# EAGLE board lpc21481 (EAGLE 9.4.1)
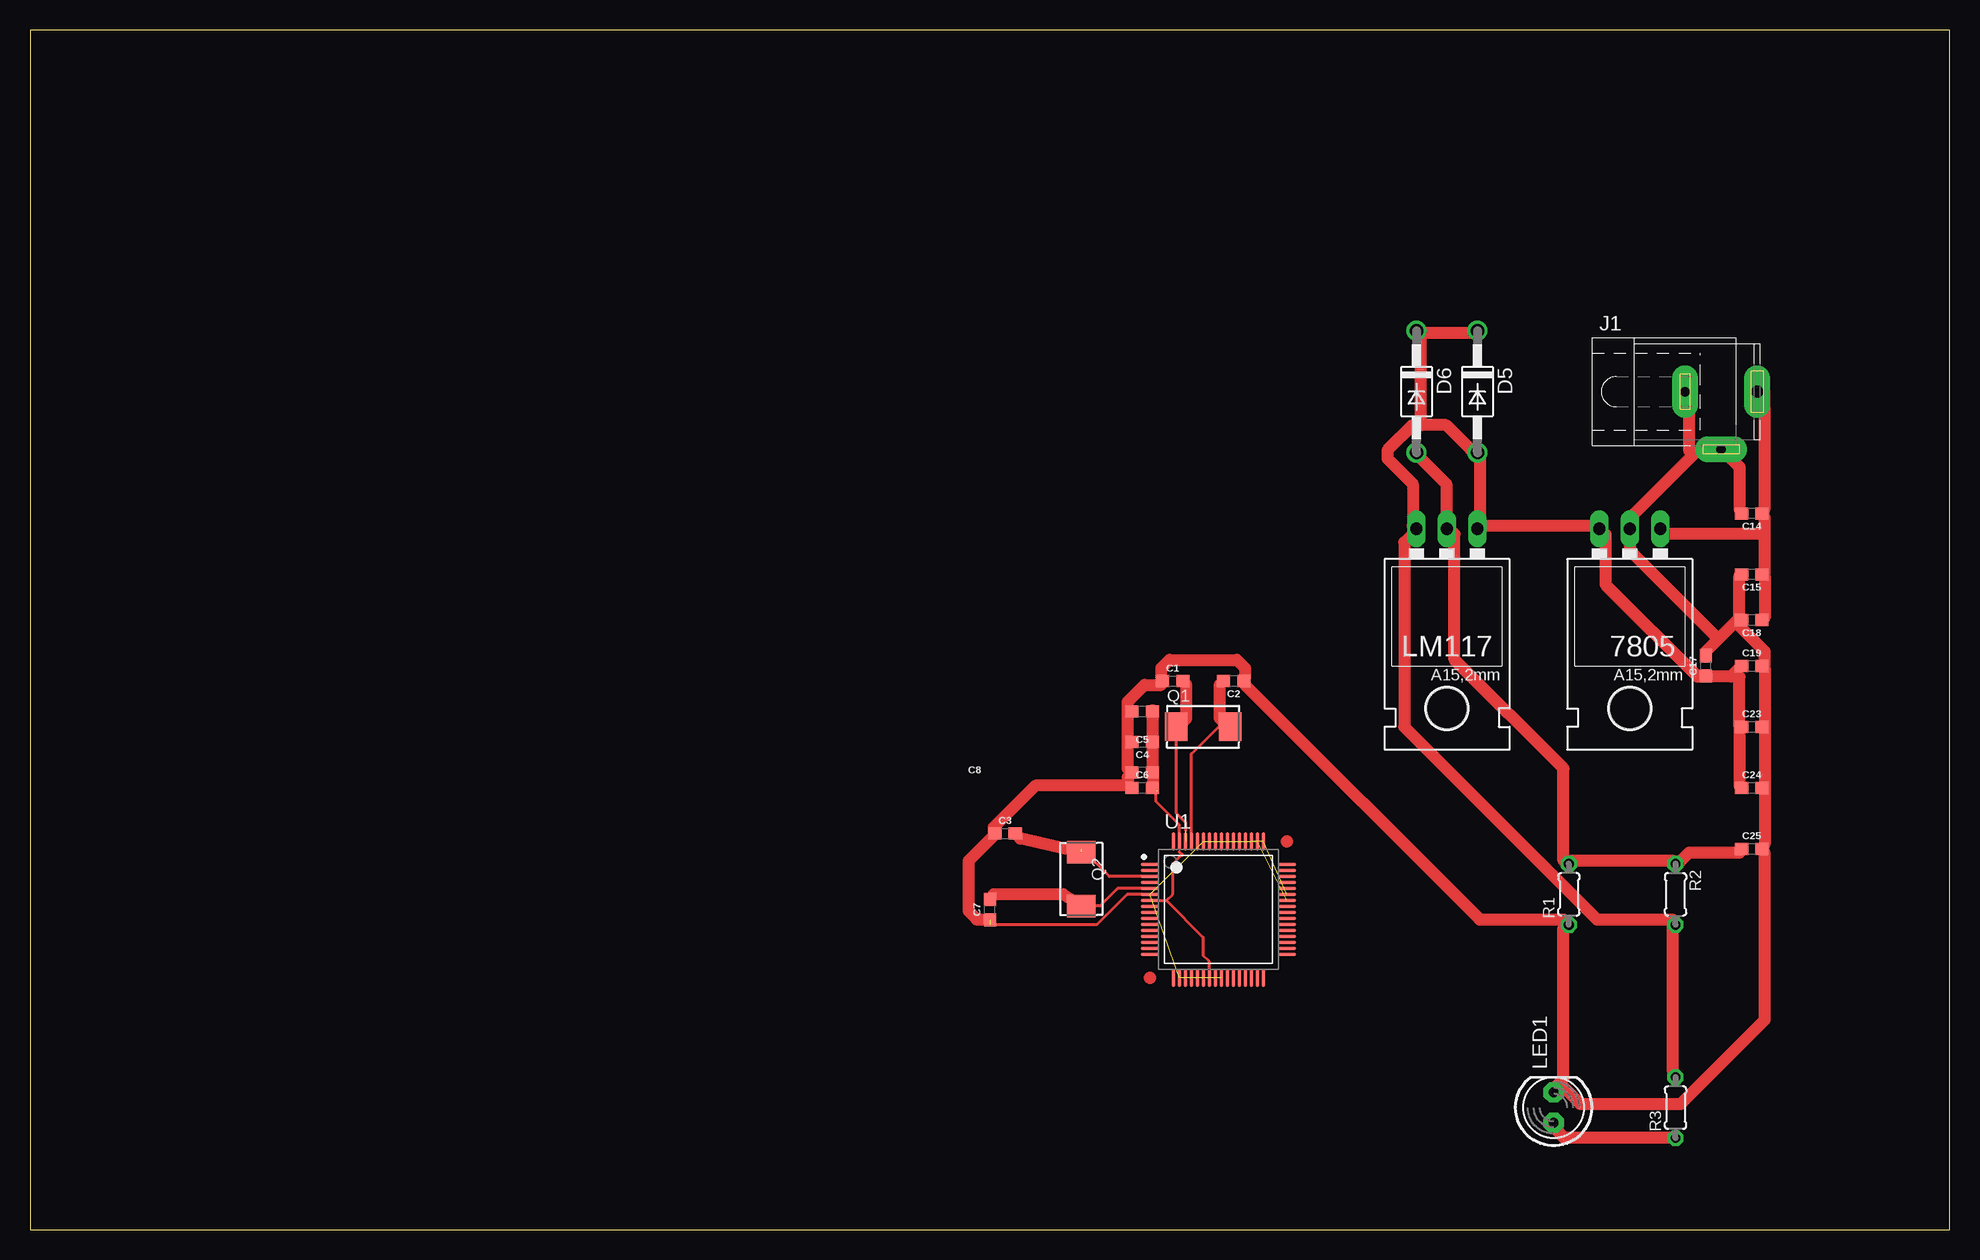
[diagram p0: board, top side]

Size 160 x 100 mm. Coordinates in mm from the lower left corner, seen from the top.
Outline: 0,0 160,0 160,100 0,100 0,0
Copper layers (1*16): Top 0.035mm / dielectric 1.5mm / Bottom 0.035mm
Design rules "default": minimum track width 6mil, minimum drill 0.35mm, track to track 6mil, track to pad 6mil, pad to pad 6mil, via to via 6mil, smd to smd 6mil, copper to edge 40mil, drill to drill 6mil, minimum pad ring 10mil, minimum via ring 8mil, stop-mask expansion 4mil, vias tented up to drill 0mil, thermal gap 10mil
Net classes: 0 default: width 0.254 mm, drill 0.254 mm, clearance 0.254 mm

## Footprints (pad centres in the part's own frame; a part is rotated, then mirrored left to right if it is on the bottom)
78XXL = drill 1.016 long: GND 0,-3.81; IN -2.54,-3.81; OUT 2.54,-3.81 | hole 3.302: 0,11.176
0603 = smd 1.1 x 1: 1 -0.85,0; 2 0.85,0
DO41-10 = drill 1.118: A 5.08,0; C -5.08,0
SPC4078 = drill 0.8 pad 2.184 long: 1 -3,0; 2 0,-4.8 | drill 1 pad 2.184 long: 3 3,0
LED5MM = drill 0.813 pad 1.676 octagon: A -1.27,0; K 1.27,0
6.0X3.5_2 = smd 1.9 x 2.4: 1 -2.25,0; 2 2.25,0
0204/5 = drill 0.813 octagon: 1 -2.54,0; 2 2.54,0
TSQFP50P1200X1200X160-64N = smd 1.55 x 0.3: 1 -5.7,3.75; 2 -5.7,3.25; 3 -5.7,2.75; 4 -5.7,2.25; 5 -5.7,1.75; 6 -5.7,1.25; 7 -5.7,0.75; 8 -5.7,0.25; 9 -5.7,-0.25; 10 -5.7,-0.75; 11 -5.7,-1.25; 12 -5.7,-1.75; 13 -5.7,-2.25; 14 -5.7,-2.75; 15 -5.7,-3.25; 16 -5.7,-3.75; 33 5.7,-3.75; 34 5.7,-3.25; 35 5.7,-2.75; 36 5.7,-2.25; 37 5.7,-1.75; 38 5.7,-1.25; 39 5.7,-0.75; 40 5.7,-0.25; 41 5.7,0.25; 42 5.7,0.75; 43 5.7,1.25; 44 5.7,1.75; 45 5.7,2.25; 46 5.7,2.75; 47 5.7,3.25; 48 5.7,3.75 | smd 0.3 x 1.55: 17 -3.75,-5.7; 18 -3.25,-5.7; 19 -2.75,-5.7; 20 -2.25,-5.7; 21 -1.75,-5.7; 22 -1.25,-5.7; 23 -0.75,-5.7; 24 -0.25,-5.7; 25 0.25,-5.7; 26 0.75,-5.7; 27 1.25,-5.7; 28 1.75,-5.7; 29 2.25,-5.7; 30 2.75,-5.7; 31 3.25,-5.7; 32 3.75,-5.7; 49 3.75,5.7; 50 3.25,5.7; 51 2.75,5.7; 52 2.25,5.7; 53 1.75,5.7; 54 1.25,5.7; 55 0.75,5.7; 56 0.25,5.7; 57 -0.25,5.7; 58 -0.75,5.7; 59 -1.25,5.7; 60 -1.75,5.7; 61 -2.25,5.7; 62 -2.75,5.7; 63 -3.25,5.7; 64 -3.75,5.7

## Placement (x,y rotation side)
7805  [78XXL]  133.35,54.61 180 top
C1  0.1uF  [0603]  95.25,45.72 0 top
C2  0.1uF  [0603]  100.33,45.72 180 top
C3  0.1uF  [0603]  81.28,33.02 0 top
C4  0.1uF  [0603]  92.71,40.64 180 top
C5  0.1uF  [0603]  92.71,38.1 180 top
C6  0.1uF  [0603]  92.71,36.83 0 top
C7  0.1uF  [0603]  80.01,26.67 90 top
C8  0.1uF  [0603]  92.71,43.18 180 top
C14  470UF  [0603]  143.51,59.69 180 top
C15  0.1UF  [0603]  143.51,54.61 180 top
C17  10uF  [0603]  139.7,46.99 90 top
C18  22pF  [0603]  143.51,50.8 180 top
C19  10uF  [0603]  143.51,46.99 0 top
C23  0.1Uf  [0603]  143.51,41.91 0 top
C24  220uF  [0603]  143.51,36.83 0 top
C25  10uf  [0603]  143.51,31.75 0 top
D5  1N4004  [DO41-10]  120.65,69.85 270 top
D6  1N4004  [DO41-10]  115.57,69.85 270 top
J1  [SPC4078]  140.97,69.85 0 top
LED1  [LED5MM]  127,10.16 90 top
LM117  [78XXL]  118.11,54.61 180 top
Q1  [6.0X3.5_2]  97.79,41.91 0 top
Q2  [6.0X3.5_2]  87.63,29.21 270 top
R1  392  [0204/5]  128.27,27.94 90 top
R2  240  [0204/5]  137.16,27.94 270 top
R3  150  [0204/5]  137.16,10.16 90 top
U1  LPC2148FBD64  [TSQFP50P1200X1200X160-64N]  99.06,26.67 0 top

## Library data of the parts
7805 LM117 = v-reg
C1-C8 = SparkFun-Capacitors; PROD_ID: CAP-00867
C14 C15 C17-C19 C23-C25 = SparkFun-Capacitors; PROD_ID: CAP-07876
D5 D6 = diode
J1 = con-jack; OC_FARNELL: unknown; OC_NEWARK: unknown
LED1 = adafruit
Q1 Q2 = crystal-geyer_V1_0
R1-R3 = resistor
U1 = philips-5

## Nets
3.3V: C4.1 C5.1 C6.2 C8.1 U1.63
5V: 7805.OUT C17.1 C19.1 C23.1 C24.1 D5.A D5.C D6.C LM117.IN LM117.OUT R2.2 R3.2
12V: 7805.IN C14.1 C15.1 C18.1 J1.3
GND: 7805.GND C1.1 C2.1 C3.1 C4.2 C5.2 C6.1 C7.1 C8.2 C14.2 C15.2 C17.2 C18.2 C19.2 C23.2 C24.2 C25.2 J1.1 J1.2 LED1.K R1.1 U1.6 U1.18 U1.25 U1.42 U1.50 U1.59
N$1: C1.2 Q1.1 U1.62
N$2: C2.2 Q1.2 U1.61
N$3: C3.2 Q2.1 U1.3
N$4: C7.2 Q2.2 U1.5
N$37: C25.1 D6.A LM117.GND R1.2 R2.1
N$57: LED1.A R3.1
S$1: U1.7 U1.23
S$2: U1.43 U1.49 U1.51

## Tracks (layer width: path | path; a pad name or v marks a point on that pad's centre or on a via)
3.3V  (1 unrouted)
  Top 0.254: 93.98,36.58 C6.2 | U1.63 95.81,33.73 93.87,35.67 93.87,36.64
  Top 1.016: C6.2 93.6,37.02 93.6,37.72 C5.1 93.6,38.42 93.6,40.51 | 93.6,40.51 93.6,43.31 C8.1 | 93.6,40.51 C4.1
5V
  Top 1.016: R3.2 136.91,13.27 136.91,25.15 R2.2 136.91,25.84 130.62,25.84 114.55,41.91 114.55,57.28 115.25,57.98 LM117.OUT 115.25,58.67 115.25,62.17 113.16,64.26 113.16,64.96 115.25,67.06 115.95,67.06 | 139.7,46.1 141.8,46.1 142.15,46.45 | 142.15,46.45 142.49,46.8 C19.1 | 142.49,41.91 142.49,37.02 C24.1 | 142.49,41.91 142.49,46.1 142.15,46.45 | 142.49,41.91 C23.1 | 115.95,74.74 120.14,74.74 D5.C | 115.95,67.06 118.05,67.06 120.14,64.96 D5.A 120.84,64.26 120.84,58.67 | 120.84,58.67 130.62,58.67 7805.OUT 131.32,57.98 131.32,53.78 139,46.1 139.7,46.1 | 120.84,58.67 LM117.IN | 115.95,67.06 115.95,74.74 | 115.95,74.74 D6.C | 139.7,46.1 C17.1
12V
  Top 1.016: 144.59,54.48 144.59,50.99 C18.1 | 144.59,54.48 144.59,57.98 | 144.59,57.98 144.59,59.37 C14.1 144.59,60.07 144.59,69.85 J1.3 | 144.59,54.48 C15.1 | 144.59,57.98 136.21,57.98 7805.IN
GND  (6 unrouted)
  Top 0.254: U1.6 91.46,27.92 91.44,27.94 88.9,25.4 80.01,25.4
  Top 1.016: C14.2 142.49,60.07 142.49,63.56 141.1,64.96 J1.2 140.4,64.96 139,64.96 138.65,64.61 | 138.65,64.61 133.41,59.37 133.41,58.67 7805.GND 133.41,57.98 133.41,56.58 140.75,49.24 | J1.1 138.3,69.85 138.3,64.96 138.65,64.61 | 142.49,50.99 142.15,50.64 | 142.15,50.64 140.75,49.24 | 140.75,49.24 139.7,48.2 C17.2 | 142.49,50.99 142.49,54.48 C15.2 | 142.49,50.99 C18.2 | 144.59,37.02 144.59,32.13 C25.2 144.59,31.43 144.59,17.46 137.6,10.48 129.22,10.48 127.48,12.22 | 144.59,46.8 144.59,41.91 | 144.59,41.91 144.59,37.02 | 144.59,37.02 C24.2 | 144.59,41.91 C23.2 | 142.15,50.64 144.59,48.2 144.59,46.8 | 144.59,46.8 C19.2 | 127.48,12.22 127.13,11.87 LED1.K | 127.48,12.22 127.83,12.57 127.83,25.15 R1.1 127.83,25.84 120.84,25.84 101.28,45.4 C2.1 101.28,46.1 101.28,46.8 100.58,47.5 95,47.5 94.3,46.8 94.3,46.1 C1.1 94.3,45.4 92.9,45.4 91.5,44.01 91.5,43.31 | 80.33,32.83 78.23,30.73 78.23,26.54 78.93,25.84 79.63,25.84 C7.1 | 91.5,37.02 91.5,37.72 C5.2 91.5,38.42 91.5,40.51 | 91.5,40.51 91.5,43.31 | 91.5,40.51 C4.2 | 91.5,43.31 C8.2 | 80.33,32.83 80.33,33.53 83.82,37.02 91.5,37.02 | 80.33,32.83 C3.1 | 91.5,37.02 C6.1
N$1  (1 unrouted)
  Top 0.254: Q1.1 95.54,34.72 96.32,33.94 96.32,33.25
  Top 1.016: C1.2 96.39,45.4 96.39,42.61 95.69,41.91 Q1.1
N$2
  Top 0.254: U1.61 96.81,39.66 99.47,42.32
  Top 1.016: C2.2 99.19,45.4 99.19,42.61 99.47,42.32 99.89,41.91 Q1.2
N$3  (1 unrouted)
  Top 0.254: U1.3 89.96,29.42 87.63,31.75 | 86.36,31.75 86.64,31.46 Q2.1
  Top 1.016: 86.36,31.75 82.55,32.6 C3.2
N$4
  Top 0.254: U1.5 90.65,28.42 89.19,26.96 Q2.2
  Top 1.016: C7.2 80.33,27.94 86.13,27.94 Q2.2
N$37
  Top 1.016: D6.A 115.95,64.26 118.05,62.17 118.05,58.67 LM117.GND 118.75,57.98 118.75,47.5 127.83,38.42 127.83,30.73 R1.2 128.52,30.73 136.91,30.73 R2.1 137.6,30.73 138.3,31.43 142.49,31.43 C25.1
N$57
  Top 1.016: R3.1 136.91,7.68 127.83,7.68 127.13,8.38 LED1.A
S$1
  Top 0.254: 95.81,31.49 96.09,31.21 95.98,31.21 95.25,30.48 95.25,27.94 94.73,27.42 | U1.7 94.73,27.42 | 94.73,27.42 97.79,24.36 97.79,22.86 98.31,22.34 U1.23
S$2  (2 unrouted)